# Altium PCB PCB.PcbDoc
Units mil, origin at the board's own origin, x right, y up, seen from the top; angles counter-clockwise.
Board outline 2365 x 1968.5 mil, 2 copper layers (Top Layer, Bottom Layer); 38 components, 93 nets, 272 pads, 171 vias.
Unrouted connection lines stored in the file: 1.
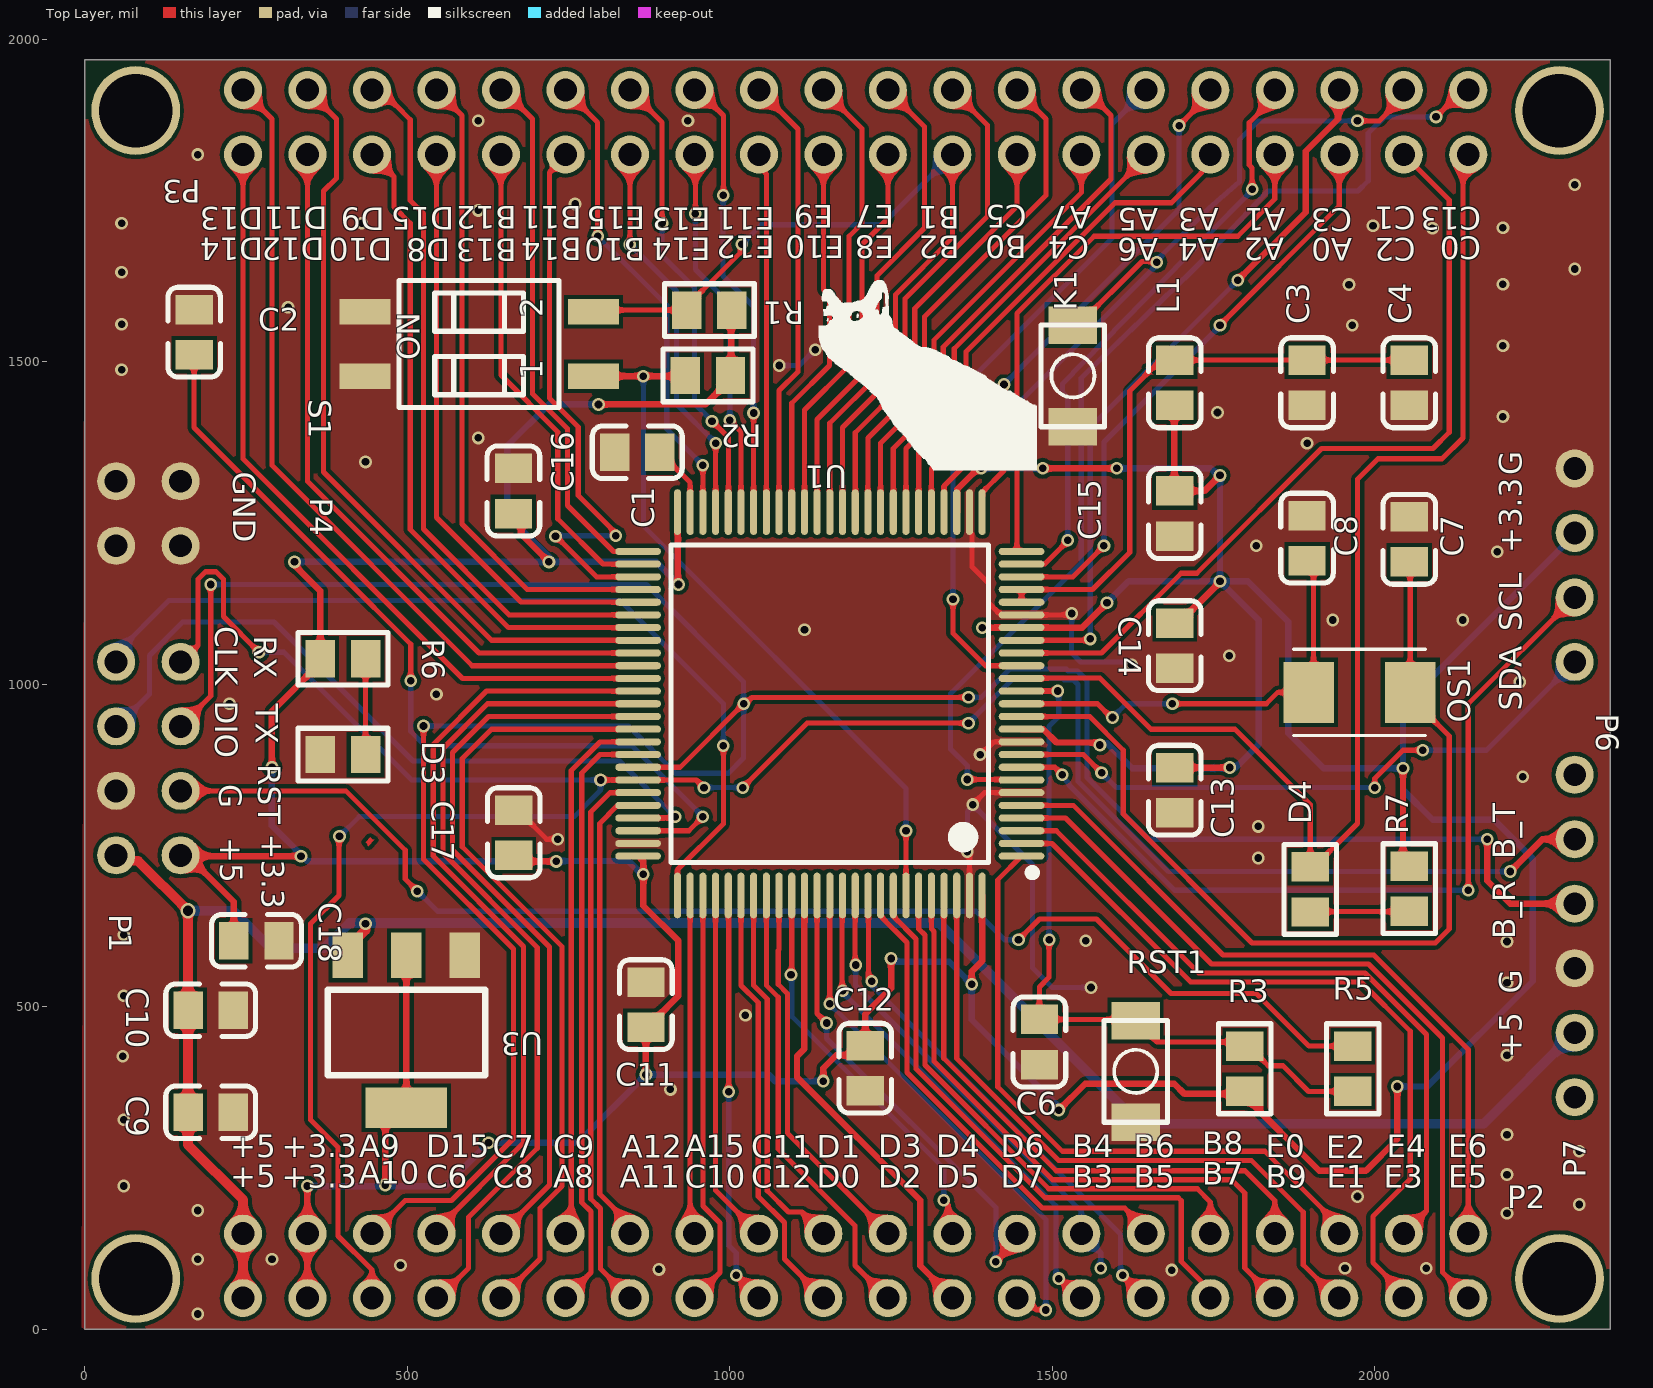
[diagram p0: Top Layer view]
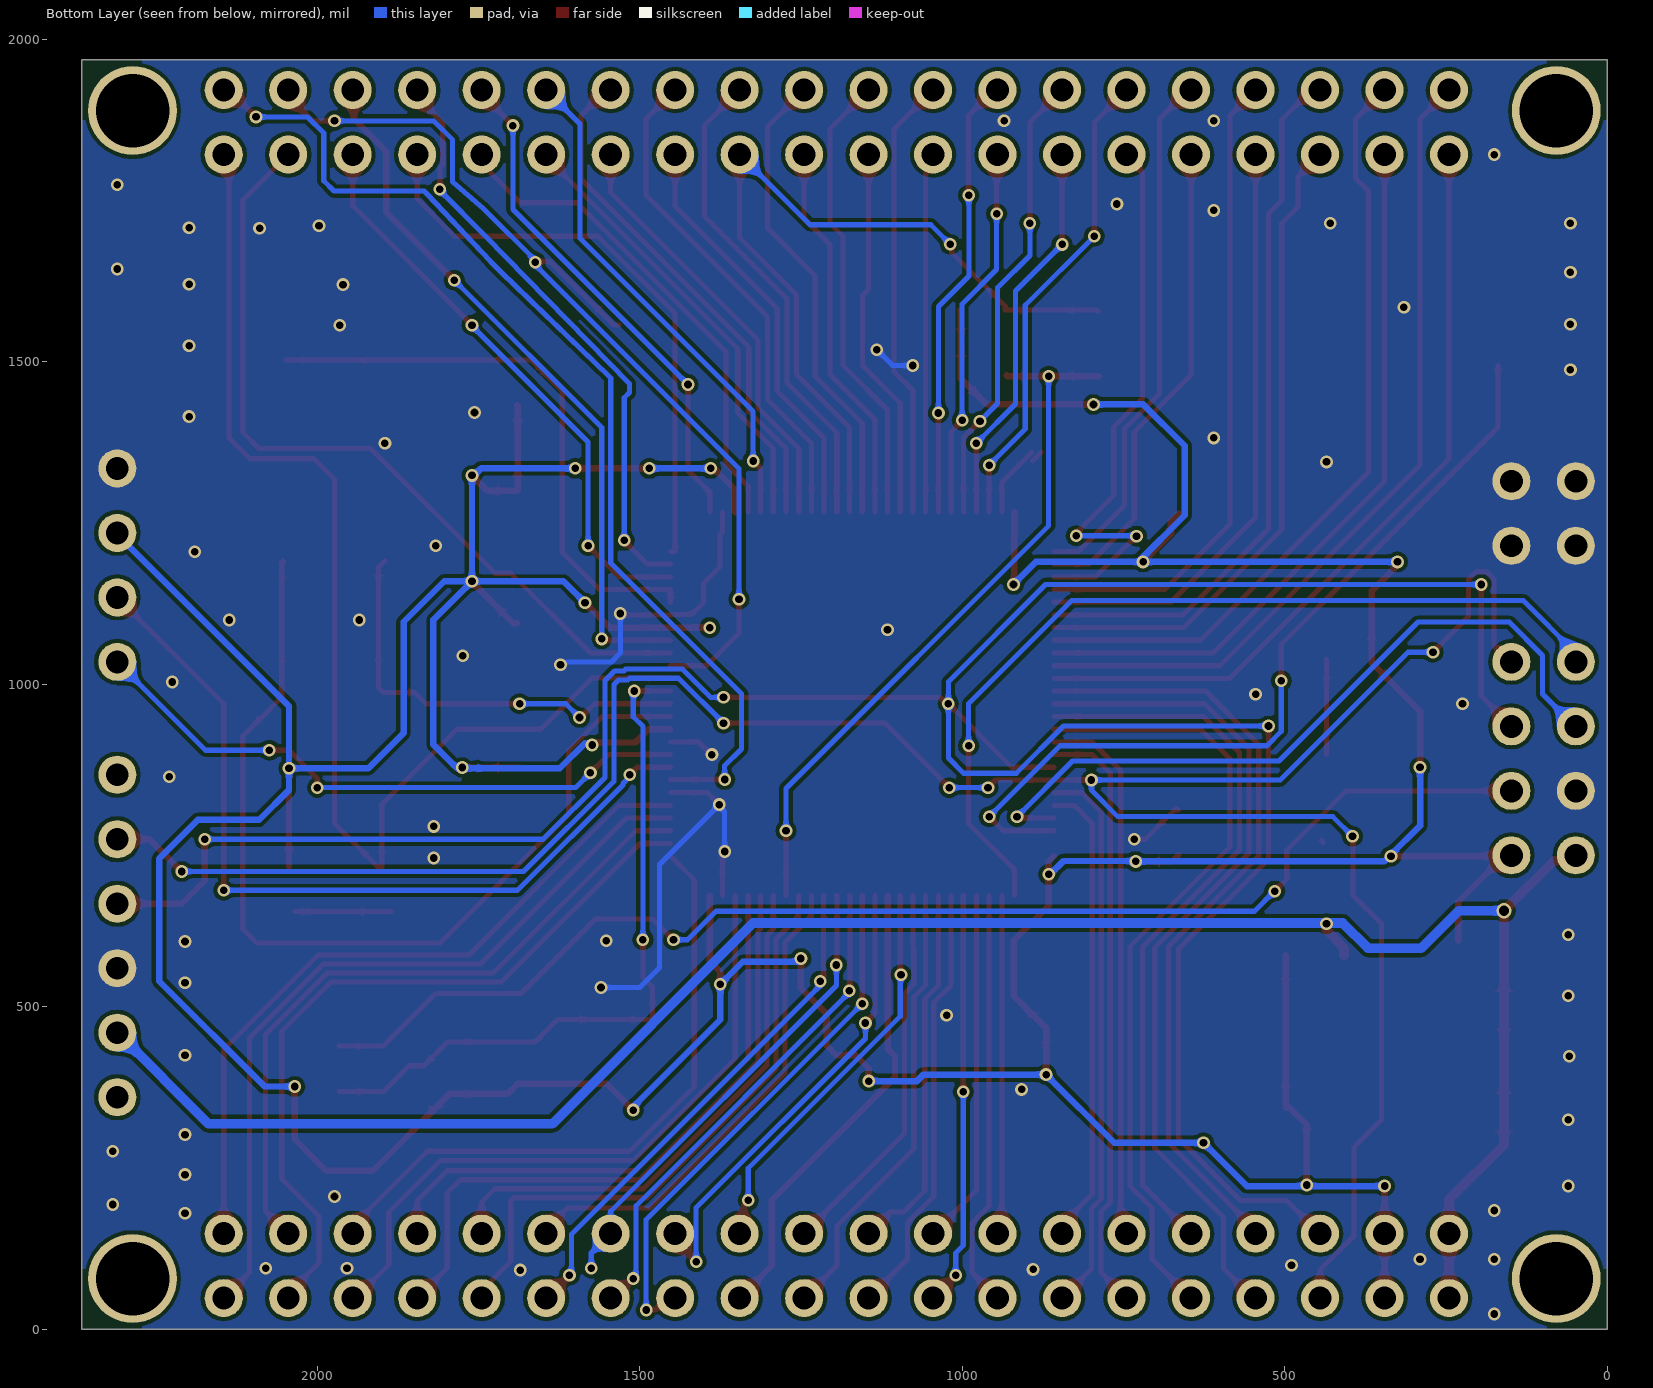
[diagram p1: Bottom Layer view, seen from below]
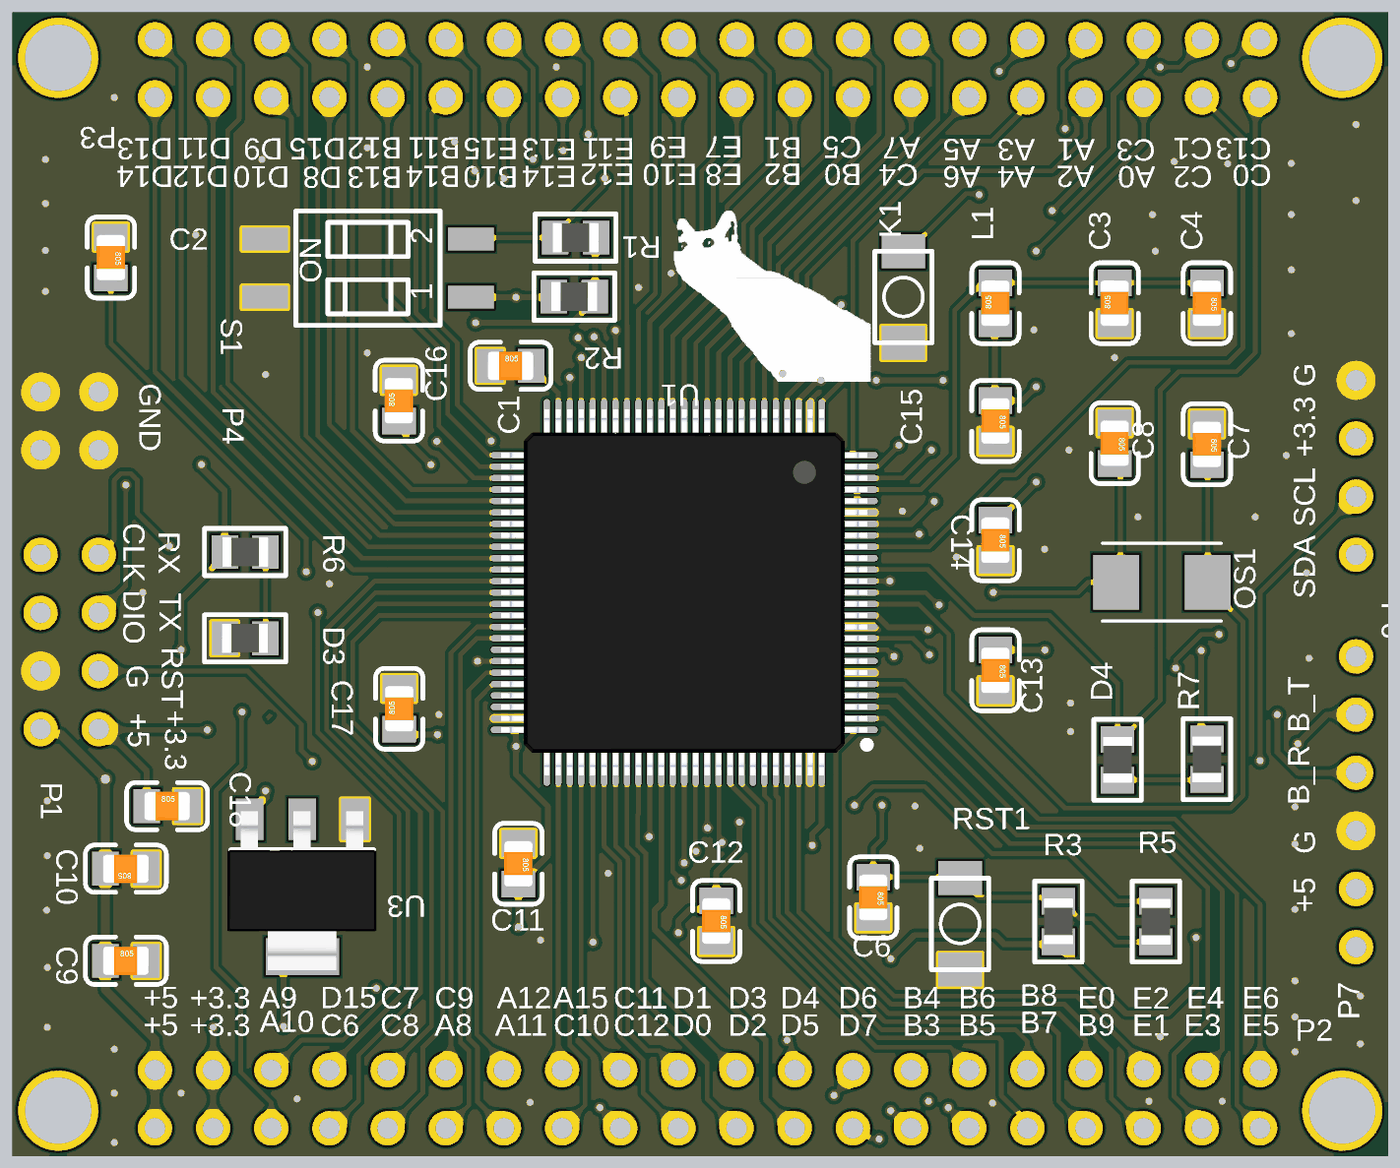
[diagram p2: 3D render of the assembled board from above, using the file's embedded part models]

## Layer stack, top to bottom
Top Solder: solder mask 0.4, Solder Resist, Dk 3.5
Top Layer: signal copper 1.4
Dielectric 1: dielectric 12.6, FR-4, Dk 4.8
Bottom Layer: signal copper 1.4
Bottom Solder: solder mask 0.4, Solder Resist, Dk 3.5

## Board outline
0,0 0,1968.5 2365,1968.5 2365,1814.45 2365,0

## Design rules (kind name [scope] priority, off if disabled: settings)
Clearance [All] p1: gap=6 ignorepadtopadclearanceinfootprint=TRUE except(0: Arc-Hole Track-Hole SMDPad-Hole THPad-Hole Via-Hole Fill-Hole Poly-Hole Region-Hole Text-Hole)
PolygonConnect [All] p1: connectstyle=Direct reliefconductorwidth=10 reliefentries=4 polygonreliefangle="90 Angle" airgapwidth=10
RoutingVias [All] p1: holewidth=28 width=50 viastyle="Through Hole" minholewidth=28 minwidth=50 maxholewidth=28 maxwidth=50
SolderMaskExpansion [All] p1: expansion=4 istentingtop=FALSE
Width [All] p1: maxlimit=30 minlimit=8 preferedwidth=8 minimp=50.000000 maximp=50.000000 favimp=50.000000
30 further rules are at their usual default settings.

## Components (designator, comment, footprint, x,y, rotation, side; value= is the part's Value field where it differs from the comment)
C1 "2.2uF" 0805_C 856.45,1360 r0 top
C2 "2.2uF" 0805_C 169.31,1546.2 r270 top
C3 "0.1uF" 0805_C 1895,1467.79 r90 top
C4 "10uF" 0805_C 2053.62,1467.79 r270 top
C6 "0.1uF" 0805_C 1480,445.59 r270 top
C7 "22pF" 0805_C 2053.62,1224.96 r270 top
C8 "22pF" 0805_C 1895,1226.85 r270 top
C9 "10uF" 0805_C 194.96,336.54 r0 top
C10 "0.1uF" 0805_C 194.96,495 r180 top
C11 "10uF" 0805_C 869.87,503.46 r270 top
C12 "0.1uF" 0805_C 1210,404.96 r270 top
C13 "0.1uF" 0805_C 1690,836.11 r270 top
C14 "0.1uF" 0805_C 1690,1060.04 r270 top
C15 "0.1uF" 0805_C 1690,1265.04 r270 top
C16 "0.1uF" 0805_C 664.45,1300 r90 top
C17 "0.1uF" 0805_C 665,770.04 r90 top
C18 "0.1uF" 0805_C 265.88,602.56 r0 top
D3 "LED" 0805_L 400.08,891.26 r180 top
D4 "LED" 0805_L 1900,682.22 r90 top
K1 "按键" SWT3*4 1531.85,1478.4 r270 top
L1 "10uh" 0805_I 1690,1467.79 r90 top
OS1 "晶振" 5032_2P 1976.26,987.76 r180 top
P1 "SWD & USART" HDR2X4 48.43,1035 r270 top
P2 "排针2*40P" HDR2X20 245,48.43 r0 top
P3 "排针2*40P" HDR2X20 245,1821.58 r0 top
P4 "排针2*2P" HDR2X2 148.43,1315 r180 top
P6 "排针4P" HDR4 2310,1335 r270 top
P7 "排针6P" HDR6 2310,360 r90 top
R1 "10K" 0805_R 968.2,1580.44 r180 top
R2 "10K" 0805_R 965.98,1479.16 r180 top
R3 "10K" 0805_R 1798.28,404.08 r90 top
R5 "1.5K" 0805_R 1965.89,404.08 r270 top
R6 "3K" 0805_R 400.08,1039.69 r0 top
R7 "3K" 0805_R 2053.62,683.39 r270 top
RST1 "按键" SWT3*4 1629.24,400 r270 top
S1 "SW-2" SWT10*6_P4 611.26,1528.01 r90 top
U1 "STM32F407VE" QFP-100_14x14x05P 1155,970 r90 top
U3 "AMS1117_3.3" SOT-223 457.87,502.01 r180 top

## Footprints (in the part's own frame and the unit in brackets; to place one, negate y for a bottom-side part, rotate by r counter-clockwise, add the part's x,y. Pads: shape width x height; smd on the part's side, far side on the other; paste and mask are expansions set on the pad)
0805_C [mm]
  rect 1.16x1.47 smd: 1(-0.89,0) 2(0.89,0)
  silkscreen extent -1.77,-1.04 1.77,1.04, body extent -1,-0.62 1,0.63, height 0.77
0805_I [mm]
  rect 1.16x1.47 smd: 1(-0.89,0) 2(0.89,0)
  silkscreen extent -1.77,-1.04 1.77,1.04, body extent -1,-0.62 1,0.63, height 0.77
0805_L [mm]
  rect 1.16x1.47 smd: 1(-0.89,0) 2(0.89,0)
  silkscreen extent -1.77,-1.03 1.77,1.04, body extent -1.02,-0.64 1.03,0.64, height 0.6
0805_R [mm]
  rect 1.16x1.47 smd: 1(-0.89,0) 2(0.89,0)
  silkscreen extent -1.77,-1.03 1.77,1.04, body extent -1.02,-0.64 1.03,0.64, height 0.6
5032_2P [mm]
  rect 2x2.4 smd: 1(-2,0) 2(2,0)
  silkscreen extent -2.6,-1.7 2.6,1.7
HDR2X2 [mm]
  round 1.5 hole 0.9: 1(0,0) 2(0,2.54) 3(2.54,0) 4(2.54,2.54)
HDR2X4 [mm]
  round 1.5 hole 0.9: 1(0,0) 2(2.54,0) 3(5.08,0) 4(7.62,0) 5(0,2.54) 6(2.54,2.54) 7(5.08,2.54) 8(7.62,2.54)
HDR2X20 [mm] "Connector; Header; 21x2 Position"
  round 1.5 hole 0.9: 1(0,0) 2(0,2.54) 3(2.54,0) 4(2.54,2.54) 5(5.08,0) 6(5.08,2.54) 7(7.62,0) 8(7.62,2.54) 9(10.16,0) 10(10.16,2.54) 11(12.7,0) 12(12.7,2.54) 13(15.24,0) 14(15.24,2.54) 15(17.78,0) 16(17.78,2.54) 17(20.32,0) 18(20.32,2.54) 19(22.86,0) 20(22.86,2.54) 21(25.4,0) 22(25.4,2.54) 23(27.94,0) 24(27.94,2.54) 25(30.48,0) 26(30.48,2.54) 27(33.02,0) 28(33.02,2.54) 29(35.56,0) 30(35.56,2.54) 31(38.1,0) 32(38.1,2.54) 33(40.64,0) 34(40.64,2.54) 35(43.18,0) 36(43.18,2.54) 37(45.72,0) 38(45.72,2.54) 39(48.26,0) 40(48.26,2.54)
HDR4 [mm]
  round 1.5 hole 0.9: 1(0,0) 2(2.54,0) 3(5.08,0) 4(7.62,0)
HDR6 [mm]
  round 1.5 hole 0.9: 1(0,0) 2(2.54,0) 3(5.08,0) 4(7.62,0) 5(10.16,0) 6(12.7,0)
QFP-100_14x14x05P [mm]
  oval 0.28x1.8 smd mask+0.051: 1(-6,-7.55) 2(-5.5,-7.55) 3(-5,-7.55) 4(-4.5,-7.55) 5(-4,-7.55) 6(-3.5,-7.55) 7(-3,-7.55) 8(-2.5,-7.55) 9(-2,-7.55) 10(-1.5,-7.55) 11(-1,-7.55) 12(-0.5,-7.55) 13(0,-7.55) 14(0.5,-7.55) 15(1,-7.55) 16(1.5,-7.55) 17(2,-7.55) 18(2.5,-7.55) 19(3,-7.55) 20(3.5,-7.55) 21(4,-7.55) 22(4.5,-7.55) 23(5,-7.55) 24(5.5,-7.55) 25(6,-7.55) 51(6,7.55) 52(5.5,7.55) 53(5,7.55) 54(4.5,7.55) 55(4,7.55) 56(3.5,7.55) 57(3,7.55) 58(2.5,7.55) 59(2,7.55) 60(1.5,7.55) 61(1,7.55) 62(0.5,7.55) 63(0,7.55) 64(-0.5,7.55) 65(-1,7.55) 66(-1.5,7.55) 67(-2,7.55) 68(-2.5,7.55) 69(-3,7.55) 70(-3.5,7.55) 71(-4,7.55) 72(-4.5,7.55) 73(-5,7.55) 74(-5.5,7.55) 75(-6,7.55)
  oval 1.8x0.28 smd mask+0.051: 26(7.55,-6) 27(7.55,-5.5) 28(7.55,-5) 29(7.55,-4.5) 30(7.55,-4) 31(7.55,-3.5) 32(7.55,-3) 33(7.55,-2.5) 34(7.55,-2) 35(7.55,-1.5) 36(7.55,-1) 37(7.55,-0.5) 38(7.55,0) 39(7.55,0.5) 40(7.55,1) 41(7.55,1.5) 42(7.55,2) 43(7.55,2.5) 44(7.55,3) 45(7.55,3.5) 46(7.55,4) 47(7.55,4.5) 48(7.55,5) 49(7.55,5.5) 50(7.55,6) 76(-7.55,6) 77(-7.55,5.5) 78(-7.55,5) 79(-7.55,4.5) 80(-7.55,4) 81(-7.55,3.5) 82(-7.55,3) 83(-7.55,2.5) 84(-7.55,2) 85(-7.55,1.5) 86(-7.55,1) 87(-7.55,0.5) 88(-7.55,0) 89(-7.55,-0.5) 90(-7.55,-1) 91(-7.55,-1.5) 92(-7.55,-2) 93(-7.55,-2.5) 94(-7.55,-3) 95(-7.55,-3.5) 96(-7.55,-4) 97(-7.55,-4.5) 98(-7.55,-5) 99(-7.55,-5.5) 100(-7.55,-6)
  silkscreen extent -6.8,-8.13 6.25,6.25, body extent -8,-8 8,8, height 1.6
SOT-223 [mm]
  rect 1.2x1.8 smd: 1(-3.33,-1.978) 2(-1.03,-1.978) 3(1.27,-1.978)
  rect 3.2x1.6 smd: 2(-1.03,4.022)
  silkscreen extent -4.13,-0.63 2.07,2.74, body extent -4.27,-2.34 2.23,4.62, height 1.6
SWT3*4 [mm]
  rect 1.48x1.9 smd: 1(-2,0) 2(2,0)
  silkscreen extent -2,-1.25 2,1.25
SWT10*6_P4 [mm]
  rect 1x2 smd: 1(-1.27,-4.5) 2(1.27,-4.5) 3(1.27,4.5) 4(-1.27,4.5)
  silkscreen extent -2.5,-3.15 2.5,3.15

## Part data
C1 C2 C3 C4 C6 C7 C8 C9 C10 C11 C12 C13 C14 C15 C16 C17 C18: library part CAP, "电容"
L1: library part 电感
P1: library part CON4-X2
R1 R2 R3 R5 R6 R7: library part RES
U1: "IC"

## Free pads (board coordinates)
  round 137.8 hole 114.17: ""(78.74,78.74) ""(78.74,1889.76) ""(2286.26,78.74) ""(2286.26,1889.76)

## Via types
v1: diameter 19.68/19.68 (per signal layer), hole 11.81, Top Layer to Bottom Layer, tented both sides, 144 vias
v2: diameter 19.68, hole 11.81, Top Layer to Bottom Layer, tented both sides, 26 vias
v3: diameter 23.62/23.62 (per signal layer), hole 15.75, Top Layer to Bottom Layer, tented both sides, 1 vias

## Nets (pads, with @x,y where several pads share a name; then routed paths per layer and width w, separated by ;. In a path a pad name is that pad's centre, name@x,y a point inside that pad or via, vN(x,y) a via of type N, cw(c..) or ccw(c..) an arc to the next point about the centre after c; other vN are vias at no path point)
3.3V: C11.2 C12.1 C13.1 C14.1 C15.1 C16.1 C17.1 C18.1 L1.1 P1.8 P2.3 P2.4 P6.2 R1.1 R2.1 R3.1 R6.1 R7.1 U1.11 U1.19 U1.28 U1.50 U1.75 U1.100 U3.2 | length 10292.2
  Top Layer w10: P1.8 149.64,733.78 P1.8@160.13,733.78 ; C18.1 230.84,663.07 P1.8@160.13,733.78 ; v1(290,871.58) 290,958.55 365.04,1033.59 R6.1 365.04,1144.96 325,1185 v2(325,1190) ; v2(335,733.78) P1.8@160.13,733.78 ; P2.3 P2.4 v1(345,222.21) ; v2(465.88,223.9) 465.88,317.08 465.8,317.16 492.29,343.66 498.42,343.66 U3.2@498.42,579.88 ; v2@623.18,289.21 v2(625.81,289.21) ; C16.1 676.47,1252.94 676.47,1232.98 v2@718.32,1191.13 ; C17.1 674.44,725.56 v1(730.84,725.56) ; v1(796.36,1434.11) 962.07,1434.11 1001.89,1473.92 1001.89,1579.08 R1.1 ; U1.75 865.88,725.66 v1(865.88,705.47) 865.88,656.97 920.29,602.56 920.29,517.38 C11.2@870.6,467.69 ; v1(869.87,395.04) C11.2 ; U1.50 919.36,1266.67 919.36,1155.93 v1(920.29,1155) ; v2(1145,385) 1145,405 1165,425 1195,425 C12.1 1210,488.92 1250,528.92 v2(1250,575) ; U1.28 1352.43,1267.82 1352.43,1302.43 1382.76,1332.76 1387.76,1332.76 v2(1390,1335) ; v2(1375,535) 1375,555 1391.22,571.22 U1.100 ; v1(1391.22,1088.11) U1.19 1452.3,1088.17 1546.42,1088.17 v1(1584.81,1126.55) ; U1.11 1485.83,930.63 1506.46,910 1570,910 v1(1573.84,906.16) ; v2(1485,1335) v2(1600,1335) ; v2(1510,340) 1550.88,380.88 1689.12,380.88 1704.97,365.03 1794.97,365.03 1914,246 1986.26,246 2035,294.74 v1(2035,376.57) ; C13.1@1686.26,871.14 C13.1 v1(1775.13,871.13) ; C14.1 1696.1,1095.08 1760,1158.98 v1(1760,1160) ; L1.1 1689.12,1431.87 1689.12,1300.96 C15.1 1736,1300.08 v1(1760,1324.08) ; R7.1@2043.74,718.42 v1(2043.74,870)
  Bottom Layer w10: v1(290,871.58) 289.83,871.4 289.83,781.23 v2@336.14,734.92 ; v2(325,1190) v2(719.45,1190) v2@725,1190 ; v2(335,733.78) 337.48,733.78 345.7,725.56 v1(730.84,725.56) 731.51,726.23 842.76,726.23 863.52,705.47 v1(865.88,705.47) ; v1(345,222.21) 558.81,222.21 v2(625.81,289.21) 764.04,289.21 v1@869.83,395 ; v1(796.36,1434.11) 719.11,1434.11 655,1370 655,1262.2 727.2,1190 885.79,1190 920.29,1155.5 v1(920.29,1155) ; v1(869.87,395.04) 1059.96,395.04 1070,385 v2(1145,385) ; v2@1250,570 1340,570 v2(1375,535) 1375,480 1510,345 v2(1510,340) ; v2(1390,1335) v2(1485,1335) ; v1(1573.84,906.16) 1575.7,908.01 1583.98,908.01 1584.89,908.92 1623.81,870 v1@1772.52,870 ; v1(1584.81,1126.55) 1618.26,1160 v1(1760,1160) ; v2(1600,1335) 1745.92,1335 1755.92,1325 v1@1760,1325 ; v1(1760,1324.08) v1(1760,1160) ; v1@1773.53,870 1783.11,870 1820,906.89 1820,1100 v1(1760,1160) ; v1(2035,376.57) 2081.57,376.57 2245,540 2245,730 2185,790 2090,790 2043.74,836.26 v1(2043.74,870) ; P6.2 2310,1232.46 2043.74,966.2 v1(2043.74,870) ; v1(1760,1160) 1803.24,1160 1865.88,1097.36 1865.88,924.69 1920.57,870 v1(2043.74,870)
+5: C9.1 C10.2 P1.4 P2.1 P2.2 P7.2 U3.3 | length 3221
  Top Layer w15: P1.4 56.86,726.57 82.28,726.57 159.74,649.11 v3(159.81,649.11) 159.81,495.11 C10.2 C9.1 159.92,286.15 245,201.07 P2.1 ; U3.3 407.87,591.69 435.12,618.94 v2(435.12,628.84)
  Bottom Layer w15: v3(159.81,649.11) 229.89,649.11 288,591 371,591 410,630 1324.33,630 1635.54,318.79 2168.79,318.79 P7.2
BOOT0: R2.2 S1.1 U1.94 | length 1116.9
  Top Layer w8: U1.94 v1(1273.11,773.15)
  Top Layer w10: S1.1 v1(865.88,1478.01) 929.79,1478.01 R2.2
  Bottom Layer w8: v1(865.88,1478.01) 865.88,1246.04 1273.11,838.81 v1(1273.11,773.15)
BOOT1: P3.23 R1.2 S1.2 U1.37 | length 1292.2
  Top Layer w8: S1.2 790.85,1580.44 R1.2 933.16,1586.54 1016.1,1669.47 1016.1,1680.2 v1(1018.33,1682.44) ; U1.37 1174.68,1398.56 1256.8,1480.68 1256.8,1604.32 1345,1692.52 P3.23
  Bottom Layer w8: v1(1018.33,1682.44) 1048.57,1712.67 1236.1,1712.67 P3.23
BT_RX: P1.6 P2.6 P7.4 U1.68 | length 4553.4
  Top Layer w8: P1.6@148.43,935.57 195,982.15 v1(195,1155) ; P2.6 496.57,200 568.43,200 664.45,296.02 664.45,589.57 525,729.02 v1(525,935.57) ; U1.68 922.95,871.58 v1(1021.38,970) ; v1@1020,970 v1(1021.38,970) ; v2(1370,980) 1034.54,980 1024.54,970 v1(1021.38,970)
  Top Layer w10: v2(2174.53,760) 2174.53,695.47 2210,660 P7.4
  Bottom Layer w8: v1(195,1155) 870.69,1155 1021.38,1004.31 v1(1021.38,970) 1021.38,885.89 997.8,862.32 916.09,862.32 842.84,935.57 v1(525,935.57) ; v2(1370,980) 1390,980 1433.69,1023.69 1521.51,1023.69 1524.2,1021 1539,1021 1554,1006 1554,855.8 1649.8,760 v2(2174.53,760)
BT_TX: P1.5 P2.5 P7.5 U1.69 | length 3979.6
  Top Layer w8: P1.5 149.55,1035 175.16,1060.6 175.16,1163.22 186.78,1174.84 203.22,1174.84 214.84,1163.22 214.84,1105.16 v1(270,1050) ; v1(394.76,764.53) 393.92,763.68 393.92,672.76 350,628.84 350,325 392.62,282.38 392.62,144.91 445,92.53 P2.5 ; v1(799.54,851.88) 857.69,851.88 U1.69 948.11,851.89 v2(960,840) ; v2(1020,840) 1120,940 v2(1370,940)
  Top Layer w10: v2(2210,710) 2260,760 P7.5
  Bottom Layer w8: v1(270,1050) 308.55,1050 506.67,851.88 v1(799.54,851.88) 799.54,835.92 758.62,795 425.24,795 v1(394.76,764.53) ; v2(960,840) v2(1020,840) ; v2(1370,940) 1439.69,1009.69 1515.72,1009.69 1518.4,1007 1533,1007 1540,1000 1540,850 1680,710 v2(2210,710)
GND: C1.1 C2.1 C3.1 C4.2 C6.2 C7.1 C8.1 C9.2 C10.1 C11.1 C12.2 C13.2 C14.2 C15.2 C16.2 C17.2 C18.2 D3.2 K1.2 P1.3 P4.1 P4.2 P4.3 P4.4 P6.1 P7.3 RST1.2 S1.3 S1.4 U1.6 U1.10 U1.20 U1.27 U1.74 U1.99 U3.1 | length 1304.7
  Top Layer w8: C17.2@667.43,807.5 C17.2 671.1,805.08 716.18,760 v1(733.2,760) ; v1(1368.27,741.04) 1371.54,737.77 U1.99 ; U1.27 1371.54,1236.51 1375.71,1232.33 1375.71,1182.22 1401.06,1156.87 1401.06,1126.81 1419.49,1108.38 1451.67,1108.38 U1.20 1527.8,1107.8 v1(1530,1110) ; v1(1376.4,813.69) 1394.91,832.21 U1.6 ; v1(1388.02,891.26) 1389.19,891.26 1408.87,910.95 U1.10
  Bottom Layer w8: v1(1076.42,1494.54) 1107.63,1494.54 v1(1132.28,1519.19) ; v1(1368.27,741.04) 1368.27,802.4 1376.4,810.53 v1(1376.4,813.69) 1469.29,720.79 1469.29,560.71 1500,530 v1(1560,530) ; v1(1530,1110) 1530,1048.69 1543.69,1035 1612.23,1035 1614.23,1033 1620.53,1033 v1(1622.76,1030.76)
  other v1: 175.16,23.8 1685.1,91.96 890,92.95 1953.92,94.96 2080,94.96 489.41,99.21 175.16,108.9 290,108.9 2205,180 175.16,184.4 2317.26,193.69 1973.26,206 60,222.21 2205,240 2317.26,276.1 2205,302.03 60,325 907.84,372.07 58.74,423.66 2205,425 1024.12,486.96 60,517.38 2205,537.42 2205,601.41 1551.76,602.56 60,611.67 1819.24,730.84 1819.24,779.84 2229.24,856.89 224.12,970 545,985 2225,1003.86 1774.53,1044.57 1115.79,1084.57 1935,1100 2136.58,1100 2190,1205.97 1816.3,1215 435.12,1345 1895,1374.1 610,1382.25 2198.69,1415.34 1756.13,1421.7 56.86,1487.96 2198.69,1525 1965,1557.14 56.86,1558.4 315,1585 1960,1620 2198.69,1620.34 56.86,1639.11 2310,1644.24 2089.37,1707.52 2198.69,1708.12 1997.26,1711.21 56.86,1715 429,1715 610,1735 760,1745 2310,1775 175.16,1821.58 610,1873.84 935,1873.84
KEY_PC1: K1.1 P3.38 U1.16 | length 1544.6
  Top Layer w8: v1(1346,1131.99) 1346,1079.39 1396.34,1029.06 U1.16 ; K1.1 1540.12,1557.14 1638.99,1656.01 1660.42,1656.01 v1(1661.93,1654.5) ; v1(1973.26,1873.84) 2006.85,1873.84 2045,1911.99 P3.38
  Bottom Layer w8: v1(1346,1131.99) 1346,1334.37 1658.19,1646.56 1658.19,1647.6 1661.93,1651.34 v1(1661.93,1654.5) ; v1@1658.19,1653.77 1742.54,1738.13 1742.77,1738.32 1790,1778.98 1790,1800.11 1790,1802.06 1790,1844.43 1819.42,1873.84 v1(1973.26,1873.84)
LED_PC0: D4.2 P3.39 U1.15 | length 1893.2
  Top Layer w8: U1.15 1452.71,1009.84 1573.59,1009.84 1652.8,930.63 1783.11,930.63 1900,813.74 D4.2 1906.1,717.26 1973.26,784.42 1973.26,1318.26 2005,1350 2104.32,1350 2136.58,1382.25 2136.58,1813.15 P3.39
NetC1_2: C1.2 U1.49 | length 131.3
  Top Layer w8: C1.2@877.63,1360 C1.2@891.09,1346.54 ; C1.2 938.46,1313.02 U1.49
NetC2_2: C2.2 U1.73 | length 1323.6
  Top Layer w8: C2.2@169.31,1494.54 169.31,1398.27 393.92,1173.66 505.16,1062.42 v1(505.16,1005.74) ; U1.73 936.3,773.15 v1(958.15,795)
  Bottom Layer w8: v1(505.16,1005.74) 505.16,927.35 527.51,905 848.15,905 v1(958.15,795)
NetD3_1: D3.1 R6.2 | length 148.4
  Top Layer w8: D3.1 R6.2
NetD4_1: D4.1 R7.2 | length 150
  Top Layer w8: D4.1@1885,647.76 R7.2@2035,647.76
NetP1_7: P1.7 R5.1 | length 2034.3
  Top Layer w8: P1.7 404.47,835 496.57,742.89 496.57,698.43 v1(515.47,679.53) ; v1(1447.66,604.07) 1480,636.41 1568.42,636.41 1683.99,520.84 1816.35,520.84 1898.08,439.12 R5.1
  Bottom Layer w8: v1(515.47,679.53) 546.73,648.27 1381.73,648.27 1425.93,604.07 v1(1447.66,604.07)
OLED_SCL: P6.3 U1.8 | length 1297.3
  Top Layer w8: U1.8 1503.89,871.58 v2(1515.47,860) ; v2(2145,680.88) 2145,970 P6.3
  Bottom Layer w8: v2(1515.47,860) 1515.47,856.84 1526,846.31 1526,844.2 1689.32,680.88 v2(2145,680.88)
OLED_SDA: P6.4 U1.9 | length 968.2
  Top Layer w8: U1.9 1548.02,891.26 v2(1576.38,862.91) ; v2(2000,840) 2000,854.32 2043.74,898.06 v2(2074.53,898.06)
  Bottom Layer w8: v2(1576.38,862.91) 1599.28,840 v2(2000,840) ; v2(2074.53,898.06) 2173.06,898.06 P6.4
OS_8M_IN: C7.2 OS1.1 U1.12 | length 1470.9
  Top Layer w8: U1.12 1452.44,950.12 1557.94,950.12 1610,898.06 1610,798.89 1809.78,599.11 2093.85,599.11 2115.47,620.73 2115.47,919.98 2090.94,944.51 2090.37,944.51 2054.88,980 C7.2@2054.88,1188.66
  Top Layer w10: C7.2 C7.2@2054.88,1188.66
OS_8M_OUT: C8.2 OS1.2 U1.13 | length 681.5
  Top Layer w8: U1.13 1570,970 1591.22,948.78 v1(1593.29,948.78) ; v1(1686.24,970) 1831.66,970 1849.41,987.76 OS1.2 1905,995.24 1905,1181.81 C8.2
  Bottom Layer w8: v1(1593.29,948.78) 1614.51,970 v1(1686.24,970)
PA0: P3.35 U1.23 | length 905.5
  Top Layer w8: U1.23 1531.85,1166.85 v1(1580,1215) ; v1(1760,1557.17) 1945,1742.17 P3.35
  Bottom Layer w8: v1(1580,1215) 1580,1375.81 1760,1555.81 v1(1760,1557.17)
PA1: P3.34 U1.24 | length 927.3
  Top Layer w8: U1.24 1452.44,1186.73 1488.33,1186.73 1524,1222.41 v1(1524,1223.36) ; v1(1809.84,1767.96) 1809.84,1800.83 1805.47,1805.2 1805.47,1870.83 1845,1910.36 P3.34
  Bottom Layer w8: v1(1524,1223.36) 1524,1444.58 1516,1452.58 1516,1466.2 1739.07,1695.06 1809.84,1765.82 v1(1809.84,1767.96)
PA2: P3.33 U1.25 | length 918.3
  Top Layer w8: U1.25 1445.47,1206.22 1445,1206.69 1445,1575 1565,1695 1787.48,1695 1845,1752.52 P3.33
PA3: P3.32 U1.26 | length 800.9
  Top Layer w8: U1.26 1391.22,1297.99 1425,1331.77 v1(1425,1465) ; v1(1696.58,1866.58) 1745,1915 P3.32
  Bottom Layer w8: v1(1425,1465) 1696.58,1736.58 v1(1696.58,1866.58)
PA4: P3.31 U1.29 | length 776.8
  Top Layer w8: U1.29 1332.17,1307.85 1366.02,1341.71 1366.02,1515.82 1597.04,1746.84 1684.95,1746.84 1730.98,1792.87 1730.98,1793.74 1745,1807.76 P3.31
PA5: P3.30 U1.30 | length 792.1
  Top Layer w8: U1.30 1312.48,1334.9 v1(1324.12,1346.54)
  Bottom Layer w8: v1(1324.12,1346.54) 1324.12,1423.45 1592.48,1691.81 1592.48,1869.05 P3.30
PA6: P3.29 U1.31 | length 700.2
  Top Layer w8: U1.31 1292.8,1365.72 1347.95,1420.87 1347.95,1520.48 1645,1817.52 P3.29
PA7: P3.28 U1.32 | length 809.2
  Top Layer w8: U1.32 1273.11,1365.83 1330.8,1423.52 1330.8,1523.12 1591.22,1783.54 1591.22,1882.05 1551.69,1921.58 P3.28
PA8: P2.11 U1.67 | length 935.9
  Top Layer w8: P2.11 784.53,87.95 784.53,182.57 770.32,196.78 770.32,862.91 798.68,891.26 U1.67
PA11: P2.13 U1.70 | length 864.7
  Top Layer w8: P2.13 799.53,93.9 799.53,187.37 784.32,202.58 784.32,802.15 814.19,832.01 857.56,832.01 U1.70
PA12: P2.14 U1.71 | length 726.9
  Top Layer w8: P2.14 845,163.11 798.32,209.79 798.32,784.55 812.32,798.55 812.32,799.26 821.41,808.35 821.64,808.35 824.3,811.01 825.5,811.01 827.02,812.52 U1.71
PA13: P1.2 U1.72 | length 1151.8
  Top Layer w8: U1.72 912.84,792.84 v1(915,795)
  Bottom Layer w8: P1.2 50,935 100,985 100,1045 151.65,1096.65 293.35,1096.65 508.84,881.16 828.84,881.16 v1(915,795)
PA14: P1.1 U1.76 | length 1381.8
  Top Layer w8: U1.76 918.78,712.85 990,784.07 v1(990,905)
  Bottom Layer w8: P1.1 48.43,1048.43 130,1130 830,1130 990,970 v1(990,905)
PA15: P2.16 U1.77 | length 527
  Top Layer w8: U1.77 938.46,154.96 P2.16
PB0: P3.25 U1.35 | length 650
  Top Layer w8: U1.35 1214.06,1382.25 1286.8,1455 1286.8,1582.79 1445,1740.98 P3.25
PB1: P3.24 U1.36 | length 761.9
  Top Layer w8: U1.36 1194.37,1390.41 1271.8,1467.84 1271.8,1598.11 1399.5,1725.81 1399.5,1867.08 P3.24
PB3: P2.27 U1.89 | length 787.9
  Top Layer w8: U1.89 1174.11,672.18 1174.11,525.89 v1(1175,525) ; v1(1509.84,78.74) 1512.26,78.74 1542.58,48.43 P2.27
  Bottom Layer w8: v1(1175,525) 1172.14,525 1171.13,526.01 1505.47,191.67 1505.47,83.11 v1(1509.84,78.74)
PB4: P2.28 U1.90 | length 735.6
  Top Layer w8: U1.90 1194.21,672.6 1194.21,565.79 v1(1195,565)
  Bottom Layer w8: v1(1195,565) 1195,533.06 1545,183.06 P2.28 1575,118.43 v1(1575,94.96)
PB5: P2.29 U1.91 | length 803.1
  Top Layer w8: U1.91 1214.84,671.97 1214.84,545.16 v1(1220,540) ; v1(1608.95,84) 1644.53,48.43 P2.29
  Bottom Layer w8: v1(1220,540) 1220,533.18 1605.47,147.7 1605.47,87.48 v1(1608.95,84)
PB6: P2.30 U1.92 | length 769.4
  Top Layer w8: U1.92 1233.74,640.47 1274.53,599.68 1274.53,398.34 1484.91,187.95 1612.4,187.95 1645,155.35 P2.30
PB7: P2.31 U1.93 | length 949
  Top Layer w8: U1.93 1254,672.18 1254,640.01 1288.53,605.48 1288.53,404.14 1488.66,204 1695.31,204 1700,199.31 1700,105.06 1745,60.06 P2.31
PB8: P2.32 U1.95 | length 846.5
  Top Layer w8: U1.95 1292.8,621.01 1302.53,611.28 1302.53,409.94 1494.46,218 1724.7,218 1745,197.7 P2.32
PB9: P2.33 U1.96 | length 1007.5
  Top Layer w8: U1.96 1312.48,621.13 1316.53,617.08 1316.53,415.73 1500.26,232 1777.79,232 1798.47,211.33 1798.47,94.96 P2.33
PB10: P3.13 U1.47 | length 609.5
  Top Layer w8: v1(845,1682.27) P3.13 ; U1.47 977.99,1267.4 v1(977.99,1374.1)
  Bottom Layer w8: v1(845,1682.27) 917.09,1610.17 917.09,1435 v1(977.99,1374.1)
PB11: P3.12 U1.48 | length 742.6
  Top Layer w8: P3.12 795,1871.58 v1(795,1695) ; U1.48 v1(958.15,1340)
  Bottom Layer w8: v1(795,1695) 902.09,1587.91 902.09,1396.06 v1(958.15,1340)
PB12: P3.10 U1.51 | length 828.3
  Top Layer w8: P3.10 649.05,1921.58 693.94,1876.69 693.94,1450.61 748.2,1396.35 748.2,1277.39 819.37,1206.22 U1.51
PB13: P3.9 U1.52 | length 755
  Top Layer w8: P3.9 645,1479.75 733.2,1391.55 733.2,1256.8 803.46,1186.54 U1.52
PB14: P3.11 U1.53 | length 891.4
  Top Layer w8: v1(729.63,1230) 730,1230 793.15,1166.85 U1.53 ; P3.11 745,1818.53 720.47,1794 720.47,1443.88 765,1399.35 765,1292.84 822.96,1234.87 v1(822.96,1230.7)
  Bottom Layer w8: v1(729.63,1230) 730.1,1230.46 822.61,1230.46 822.84,1230.7 v1(822.96,1230.7)
PB15: P3.8 U1.54 | length 1004.6
  Top Layer w8: P3.8 584.53,1882.05 584.53,1248.58 685.94,1147.17 U1.54
PC2: P3.37 U1.17 | length 1264.7
  Top Layer w8: U1.17 1576.38,1048.74 1700,1172.36 1723.98,1172.36 1917.56,1365.95 2090.31,1365.95 2115.47,1391.1 2115.47,1751.1 P3.37
PC3: P3.36 U1.18 | length 1118.4
  Top Layer w8: U1.18 1556.69,1068.43 v2(1558.84,1070.58)
  Top Layer w10: v2(1787.48,1626.83) 1892.76,1732.11 1892.76,1826.65 1943.16,1877.05 1943.16,1919.73 P3.36
  Bottom Layer w8: v2(1558.84,1070.58) 1558.84,1398.19 v2(1787.48,1626.83)
PC4: P3.27 U1.33 | length 675.1
  Top Layer w8: U1.33 1253.43,1365.95 1316.8,1429.32 1316.8,1534.32 1545,1762.52 P3.27
PC5: P3.26 U1.34 | length 779.1
  Top Layer w8: U1.34 1233.74,1374.1 1301.8,1442.16 1301.8,1570.26 1490,1758.46 1490,1876.58 P3.26
PC6: P2.7 U1.63 | length 1311.2
  Top Layer w8: P2.7 548.47,48.43 595,94.96 595,174.33 701.42,280.74 701.42,592.2 555,738.62 555,900.73 624.28,970 U1.63
PC7: P2.10 U1.64 | length 1150.5
  Top Layer w8: P2.10 720.47,223.9 720.47,592.94 570,743.42 570,894.51 625.81,950.32 U1.64
PC8: P2.9 U1.65 | length 1231.8
  Top Layer w8: P2.9 705.47,108.9 705.47,187.68 740,222.21 740,593.22 585,748.22 585,885 630.63,930.63 U1.65
PC9: P2.12 U1.66 | length 843.9
  Top Layer w8: P2.12 754,157.43 754,866.38 798.57,910.95 U1.66
PC10: P2.15 U1.78 | length 651.6
  Top Layer w8: P2.15 984.53,87.95 984.53,164.8 958.15,191.18 U1.78
PC11: P2.18 U1.79 | length 552.2
  Top Layer w8: U1.79 977.83,215.59 P2.18
PC12: P2.17 U1.80 | length 644
  Top Layer w8: U1.80 998.22,672.06 v1(998.22,368.62) ; v1(1010,84) 1045,49 P2.17
  Bottom Layer w8: v1(998.22,368.62) 998.22,130.21 1010,118.43 v1(1010,84)
PC13: P3.40 U1.7 | length 1630
  Top Layer w8: v1(1368.27,852.67) 1419.41,852.67 1419.61,852.47 1451.67,852.47 U1.7 ; v1(2095,1880) 2136.58,1921.58 P3.40
  Bottom Layer w8: v1(1368.27,852.67) 1368.27,874 1342.25,900.02 1342.25,985.6 1544.84,1188.19 1544.84,1474.84 1547.24,1477.23 1547.28,1477.27 1715.08,1639.61 1731.49,1656.01 1829.91,1760.31 1834.6,1765 1974.14,1765 1990,1780.86 1990,1855 2015,1880 v1(2095,1880)
PD0: P2.19 U1.81 | length 677.3
  Top Layer w8: U1.81 1017.2,533.4 1043.96,506.64 1043.96,206.24 1084.53,165.68 1084.53,108.9 P2.19
PD1: P2.20 U1.82 | length 581.2
  Top Layer w8: U1.82 1036.89,533.51 1057.96,512.44 1057.96,214.87 1091.04,181.8 1111.63,181.8 P2.20
PD2: P2.21 U1.83 | length 702.4
  Top Layer w8: U1.83 1056.57,533.63 1075.16,515.04 1075.16,279.65 1194.21,160.59 1194.21,99.21 P2.21
PD3: P2.22 U1.84 | length 595.3
  Top Layer w8: U1.84 1076.26,588.9 1074.95,587.59 1074.95,535.06 1089.16,520.84 1089.16,304.27 P2.22
PD4: P2.24 U1.85 | length 628.5
  Top Layer w8: v1(1094.79,550) 1095.94,551.16 U1.85 ; v1(1331.67,200) 1338.72,192.95 1338.72,154.71 P2.24
  Bottom Layer w8: v1(1094.79,550) 1095.94,548.84 1095.94,485.45 1331.67,249.72 v1(1331.67,200)
PD5: P2.23 U1.86 | length 728.8
  Top Layer w10: U1.86 1115.63,435.11 1104.16,423.63 1104.16,390.84 1295,200 1295,98.43 P2.23
PD6: P2.26 U1.87 | length 739.5
  Top Layer w8: U1.87 1135.16,672.6 1135.16,489.84 v1(1150,475) ; v1(1412.48,105.06) 1445,137.58 P2.26
  Bottom Layer w8: v1(1150,475) 1150,451.19 1412.48,188.71 v1(1412.48,105.06)
PD7: P2.25 U1.88 | length 839.3
  Top Layer w8: v1(1155,505) 1154.84,505.16 1154.84,672.6 U1.88 ; P2.25@1440,48.43 1457.48,48.43 1475.39,30.52 1489.48,30.52 v1(1490,30)
  Bottom Layer w8: v1(1155,505) 1490,170 v1(1490,30)
PD8: P3.7 U1.55 | length 929.9
  Top Layer w8: P3.7 545,1258.89 676.21,1127.68 857.56,1127.68 U1.55
PD9: P3.6 U1.56 | length 1109.7
  Top Layer w8: P3.6 458.27,1921.58 481.8,1898.05 482.13,1898.05 504.55,1875.62 504.55,1750.45 525,1730 525,1240.86 658.06,1107.8 U1.56
PD10: P3.5 U1.57 | length 1022.3
  Top Layer w8: P3.5 479.47,1787.11 479.47,1740.08 504.55,1715 504.55,1240.09 656.53,1088.11 U1.57
PD11: P3.4 U1.58 | length 1215.1
  Top Layer w8: P3.4 390,1876.58 390,1785 370,1765 370,1329.21 630.58,1068.62 857.56,1068.62 U1.58
PD12: P3.3 U1.59 | length 1129.6
  Top Layer w8: P3.3 345,1315 611.26,1048.74 U1.59
PD13: P3.2 U1.60 | length 1296.9
  Top Layer w8: P3.2 290,1876.58 290,1339.71 600.66,1029.06 U1.60
PD14: P3.1 U1.61 | length 1225.4
  Top Layer w8: P3.1 245,1350 585.63,1009.37 U1.61
PD15: P2.8 U1.62 | length 1224.5
  Top Layer w8: P2.8 545,154.21 680,289.21 680,593.82 540,733.82 540,906.94 622.75,989.69 U1.62
PE0: P2.34 U1.97 | length 908.8
  Top Layer w8: U1.97 1331.67,672.26 1331.67,420.39 1506.06,246 1799,246 1845,200 P2.34
PE1: P2.35 U1.98 | length 1047.6
  Top Layer w8: U1.98 1351.85,420.01 1509.76,262.1 1808.57,262.1 1889.03,181.64 1889.03,100.07 1940.67,48.43 P2.35
PE2: P2.36 U1.1 | length 1003.8
  Top Layer w8: U1.1 1415.47,697.01 1415.47,376.19 1515.56,276.1 1829.49,276.1 1945,160.59 P2.36
PE3: P2.37 U1.2 | length 1181.1
  Top Layer w8: U1.2 1499.47,753.47 1714.51,538.42 1978.86,538.42 2055,462.28 2055,232.98 1997,174.98 1997,103.7 1997,103.65 2045,55.65 P2.37
PE4: P2.38 U1.3 | length 1081.8
  Top Layer w8: U1.3 1506.26,773.15 1726.99,552.42 1984.66,552.42 2080,457.08 2080,183.43 P2.38
PE5: P2.39 U1.4 | length 1214
  Top Layer w8: U1.4 1520.39,792.84 1746.8,566.42 1990.46,566.42 2105,451.88 2105,88.43 P2.39
PE6: P2.40 U1.5 | length 1135
  Top Layer w8: U1.5 1532.48,812.52 1764.58,580.42 1998.32,580.42 2145,433.74 P2.40
PE7: P3.22 U1.38 | length 738.7
  Top Layer w8: U1.38 1155,1405 1228.4,1478.4 1228.4,1634.12 1301.8,1707.52 1301.8,1864.77 P3.22
PE8: P3.21 U1.39 | length 599.8
  Top Layer w8: U1.39 1135.31,1410.99 1205,1480.68 1205,1682.27 1245,1722.27 P3.21
PE9: P3.20 U1.40 | length 716.2
  Top Layer w8: U1.40 1115.63,1425.63 1185,1495 1185,1695 1205,1715 1205,1861.58 P3.20
PE10: P3.19 U1.41 | length 582.6
  Top Layer w8: U1.41 1095.94,1435.94 1154.54,1494.54 1154.54,1603.05 1145,1612.59 P3.19
PE11: P3.18 U1.42 | length 691.5
  Top Layer w8: P3.18 1105.47,1861.1 1105.47,1484.84 1076.26,1455.63 U1.42
PE12: P3.17 U1.43 | length 559.2
  Top Layer w8: P3.17 1054.77,1811.81 1054.77,1793.17 1056.57,1791.36 1056.57,1429.17 1056.65,1429.09 1056.65,1267.33 U1.43
PE13: P3.16 U1.44 | length 696
  Top Layer w8: P3.16 950.47,1921.58 990,1882.05 v1(990,1758.46) ; v1(1036.81,1420.87) 1036.81,1267.33 U1.44
  Bottom Layer w8: v1(990,1758.46) 989.57,1758.03 989.57,1633.37 1036.81,1586.13 v1(1036.81,1420.87)
PE14: P3.15 U1.45 | length 584.4
  Top Layer w8: P3.15 946.58,1820 v1(946.58,1730) ; v1(1000,1409.8) 1000,1409.12 1017.2,1391.91 1017.2,1267.56 1017.36,1267.4 U1.45
  Bottom Layer w8: v1(946.58,1730) 946.58,1643.42 1000,1590 v1(1000,1409.8)
PE15: P3.14 U1.46 | length 717.8
  Top Layer w8: P3.14 895,1871.58 v1(895,1715) ; v1(972.32,1408.26) 997.84,1382.74 997.84,1267.56 U1.46
  Bottom Layer w8: v1(895,1715) 895,1665.21 945,1615.21 945,1435.58 v1(972.32,1408.26)
RST: C6.1 R3.2 R5.2 RST1.1 U1.14 | length 1111.8
  Top Layer w8: U1.14 1452.32,989.77 1508.35,989.77 v1(1508.43,989.84) ; v1(1495.03,604.07) 1493.55,602.59 1494.93,601.21 1494.93,546 1480,531.07 C6.1 1627.35,480.63 1662.39,445.59 1797.92,445.59 1834.8,408.71 1857.54,408.71 1897.2,369.04 R5.2
  Bottom Layer w8: v1(1495.03,604.07) 1495.03,935.03 1510,950 1510,988.28 v1(1508.43,989.84)
VDDA: C3.2 C4.1 L1.2 U1.21 U1.22 | length 910.3
  Top Layer w8: U1.21 U1.22 1562.48,1147.17 1620,1204.68 1620,1455.19 1667.64,1502.83 1673.74,1502.83 1863.74,1502.83 C3.2 C4.1@2048.74,1502.83
pads on no net: P7.1 P7.6

## Polygon pours and split planes (outlines as drawn)
GND on Top Layer "GND_L01_P009" (solid, pour order 9): 0,1968.5 2365,1968.5 2365,0 -4.81,0
GND on Bottom Layer "t" (solid, pour order 17): 0,1968.5 2365,1968.5 2365,0 0,0

## Silkscreen, mask and mechanical layers (free items; w line width, h text height)
Top Overlay:
  drawing of 808 lines, arcs and shapes, not listed
  text "E9" at 1160,1754.33 h60 r180
  text "E7" at 1255,1754.56 h60 r180
  text "C5" at 1459.98,1754.33 h60 r180
  text "D11" at 376.42,1752.62 h60 r180
  text "B12" at 669.45,1752.73 h60 r180
  text "B11" at 770,1752.73 h60 r180
  text "E15" at 869.17,1752.06 h60 r180
  text "B1" at 1356.69,1752.73 h60 r180
  text "A7" at 1560.4,1752.73 h60 r180
  text "C1" at 2063.19,1752.06 h60 r180
  text "D13" at 276.18,1751.51 h60 r180
  text "D9" at 464.76,1751.08 h60 r180
  text "D15" at 572.76,1751.51 h60 r180
  text "E11" at 1070,1751.42 h60 r180
  text "C13" at 2165,1751.62 h60 r180
  text "E13" at 970,1750.75 h60 r180
  text "A5" at 1664.17,1750.31 h60 r180
  text "A1" at 1860.88,1750.1 h60 r180
  text "A3" at 1757.77,1749.88 h60 r180
  text "C3" at 1965,1749.44 h60 r180
  text "E12" at 1070,1707.67 h60 r180
  text "E10" at 1177.25,1707.01 h60 r180
  text "E8" at 1255,1707.01 h60 r180
  text "B2" at 1356.69,1707.67 h60 r180
  text "B0" at 1459.98,1707.01 h60 r180
  text "C4" at 1557.44,1706.57 h60 r180
  text "C0" at 2165,1706.13 h60 r180
  text "D14" at 276.28,1704.02 h60 r180
  text "D12" at 371.79,1704.02 h60 r180
  text "B14" at 770,1704.02 h60 r180
  text "E14" at 970,1704.02 h60 r180
  text "A2" at 1859.7,1704.02 h60 r180
  text "D10" at 476.53,1703.36 h60 r180
  text "B10" at 869.17,1703.36 h60 r180
  text "A6" at 1664.17,1703.36 h60 r180
  text "A4" at 1757.77,1703.15 h60 r180
  text "A0" at 1965,1703.36 h60 r180
  text "C2" at 2063.19,1703.47 h60 r180
  text "D8" at 566.4,1702.48 h60 r180
  text "B13" at 669.45,1702.59 h60 r180
  text "GND" at 218.34,1330 h60 r270
  text "G" at 2239.33,1323.98 h60 r90
  text "+3.3" at 2239.33,1203.25 h60 r90
  text "CLK" at 190.67,1090 h60 r270
  text "SCL" at 2239.33,1082.76 h60 r90
  text "RX" at 251.1,1075.44 h60 r270
  text "DIO" at 190.67,975 h60 r270
  text "TX" at 253.16,970 h60 r270
  text "SDA" at 2239.33,959.53 h60 r90
  text "RST" at 256.77,876.16 h60 r270
  text "G" at 196.33,845.51 h60 r270
  text "+3.3" at 262.43,768.15 h60 r270
  text "+5" at 198.57,763.15 h60 r270
  text "B_T" at 2229.34,728.94 h60 r90
  text "B_R" at 2229.34,605 h60 r90
  text "G" at 2239.33,520.27 h60 r90
  text "+5" at 2239.33,420 h60 r90
  text "B8" at 1732.15,259.66 h60
  text "+5" at 225,255.46 h60
  text "+3.3" at 305,255.02 h60
  text "A9" at 425,255.02 h60
  text "D15" at 529.12,255.57 h60
  text "A15" at 930.02,255.02 h60
  text "D3" at 1230,255.02 h60
  text "D6" at 1420,255.02 h60
  text "B6" at 1626.28,255.02 h60
  text "E0" at 1831.16,255.02 h60
  text "E6" at 2113.72,255.02 h60
  text "C7" at 632.23,254.7 h60
  text "C9" at 725.83,254.7 h60
  text "A12" at 832.56,254.8 h60
  text "C11" at 1033.31,254.7 h60
  text "D1" at 1135,254.8 h60
  text "D4" at 1320,254.9 h60
  text "B4" at 1530.92,254.9 h60
  text "E2" at 1925,254.03 h60
  text "E4" at 2018.21,254.9 h60
  text "A10" at 425,214.17 h60
  text "B7" at 1732.15,212.59 h60
  text "+5" at 225,208.51 h60
  text "A8" at 725.83,208.07 h60
  text "D0" at 1135,208.07 h60
  text "D5" at 1320,208.18 h60
  text "B3" at 1530.92,208.07 h60
  text "B5" at 1626.28,208.18 h60
  text "B9" at 1831.16,208.07 h60
  text "E3" at 2013.58,208.07 h60
  text "E5" at 2113.82,208.18 h60
  text "+3.3" at 305,207.74 h60
  text "C6" at 529.12,207.74 h60
  text "C8" at 632.23,207.74 h60
  text "A11" at 829.6,207.84 h60
  text "C10" at 930.02,207.74 h60
  text "C12" at 1033.31,207.74 h60
  text "D2" at 1230,207.84 h60
  text "D7" at 1420,207.95 h60
  text "E1" at 1925.24,207.84 h60
Mechanical 1:
  lines w8: 2362.2,0 0,0 0,1970 2365,1970 2365,1814.45 2365,0

## Dimensions
0,0 to 2362.2,0 on Mechanical 1
0,0 to 0,1970 on Mechanical 1

## Text inside footprints (layer, text, board x,y; h text height)
S1: Top Overlay "ON" at 530.55,1502.42 h60 r90; Top Overlay "1" at 721.49,1472.89 h60 r90; Top Overlay "2" at 721.49,1569.35 h60 r90